# EAGLE board e-Tapperhandpiece22 (EAGLE 8.4.1)
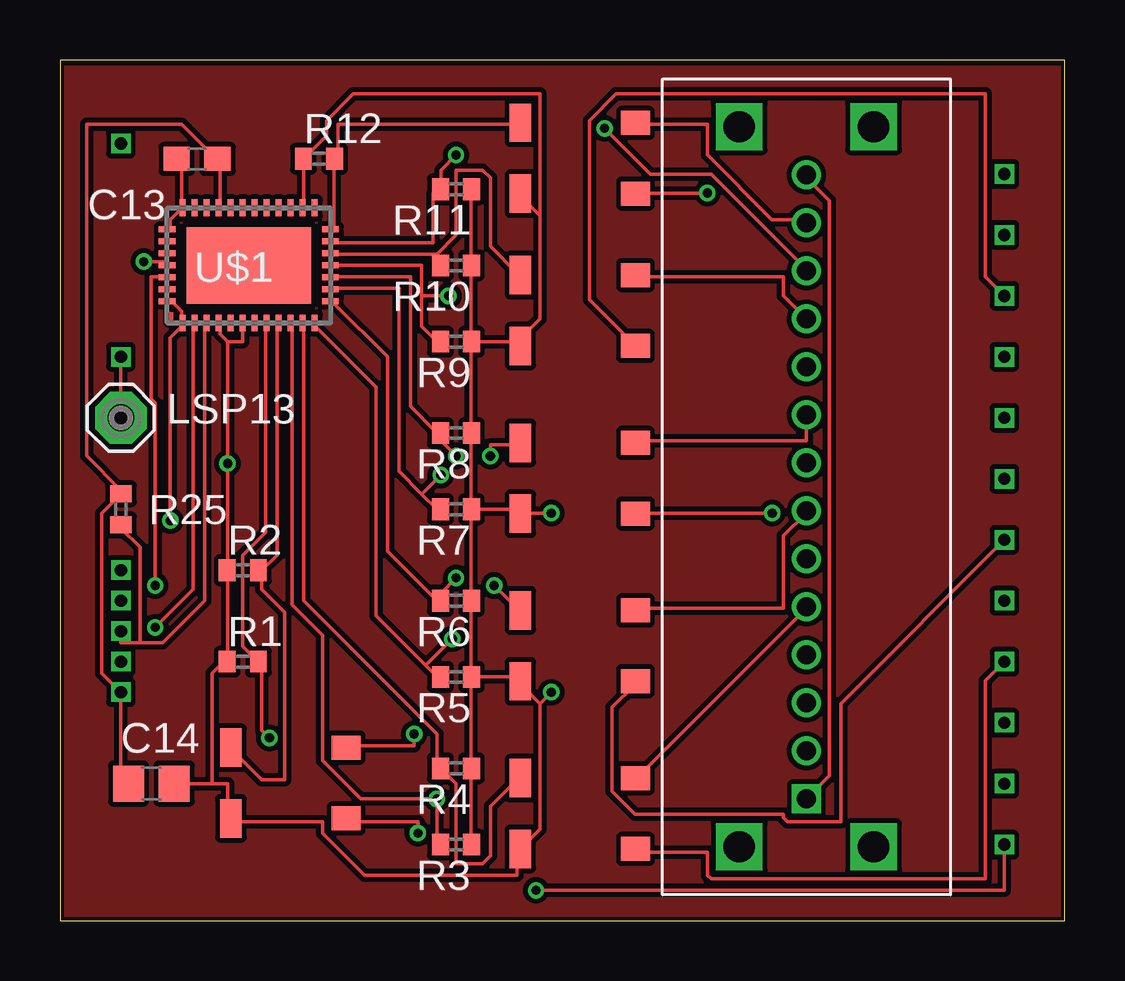
[diagram p0: board, top side]
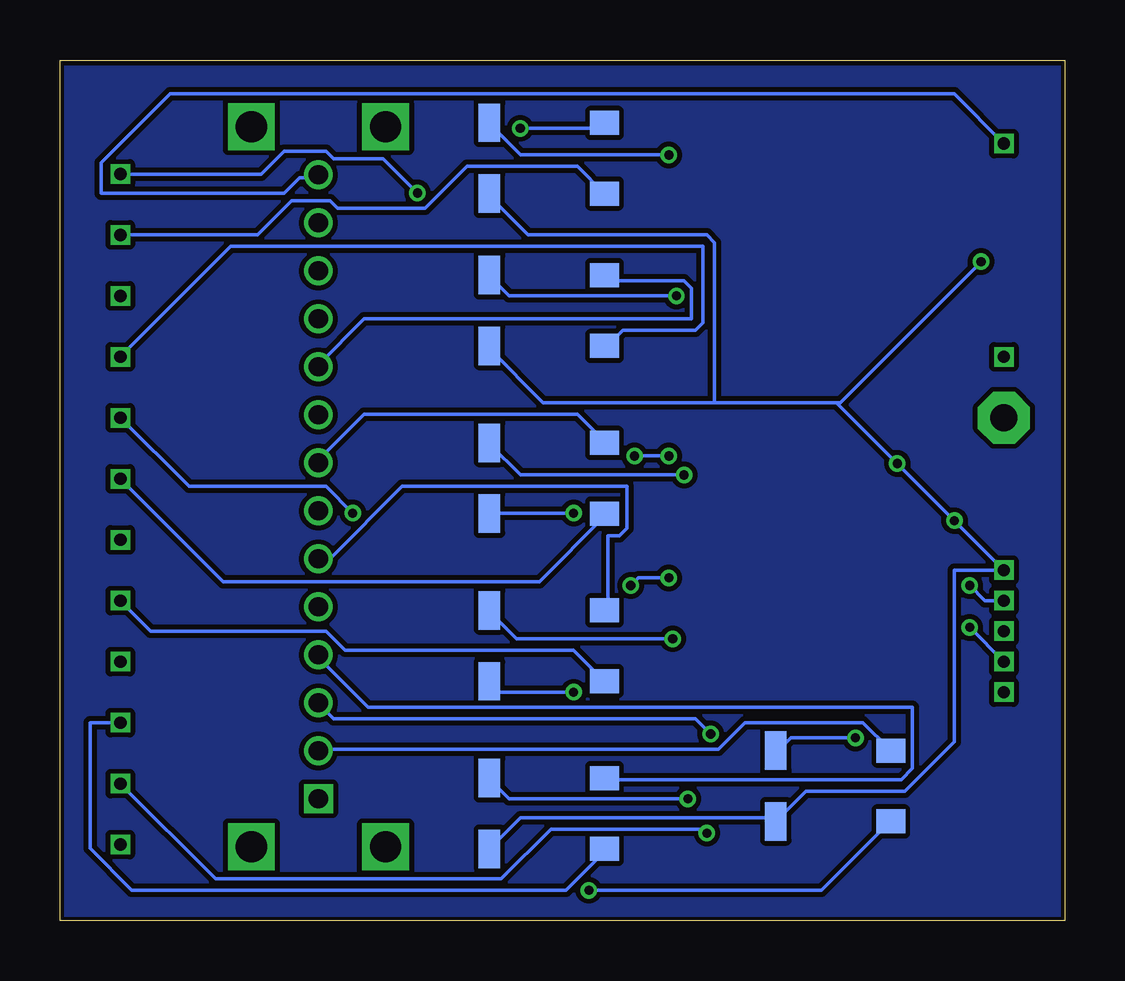
[diagram p1: board, bottom side, seen from below]

Size 41.89 x 35.87 mm. Coordinates in mm from the lower left corner, seen from the top.
Outline: 0,0 41.89,0 41.89,35.87 0,35.87 0,0
Copper layers (1*16): Top 0.035mm / dielectric 1.5mm / Bottom 0.035mm
Design rules "e-tapperhandpiece14 *": minimum track width 6mil, minimum drill 15mil, track to track 6mil, track to pad 6mil, pad to pad 6mil, via to via 6mil, smd to smd 6mil, copper to edge 6mil, drill to drill 6mil, minimum pad ring 6mil, minimum via ring 6mil, stop-mask expansion 4mil, vias tented up to drill 0mil, thermal gap 10mil
Net classes: 0 default: clearance 0.205 mm

## Footprints (pad centres in the part's own frame; a part is rotated, then mirrored left to right if it is on the bottom)
C0603 = smd 1.1 x 1: 1 -0.85,0; 2 0.85,0
C0805 = smd 1.3 x 1.5: 1 -0.95,0; 2 0.95,0
SE11 = drill 1.118 pad 2.159 octagon: MP 0,0
R0402 = smd 0.7 x 0.9: 1 -0.65,0; 2 0.65,0
ET1 = drill 0.508 square: P$1 0,0
QFN38-5X7 = smd 0.7 x 0.25: 1 -2.4,2.75; 2 -2.4,2.25; 3 -2.4,1.75; 4 -2.4,1.25; 5 -2.4,0.75; 6 -2.4,0.25; 7 -2.4,-0.25; 8 -2.4,-0.75; 9 -2.4,-1.25; 10 -2.4,-1.75; 11 -2.4,-2.25; 12 -2.4,-2.75; 20 2.4,-2.75; 21 2.4,-2.25; 22 2.4,-1.75; 23 2.4,-1.25; 24 2.4,-0.75; 25 2.4,-0.25; 26 2.4,0.25; 27 2.4,0.75; 28 2.4,1.25; 29 2.4,1.75; 30 2.4,2.25; 31 2.4,2.75 | smd 0.25 x 0.7: 13 -1.5,-3.4; 14 -1,-3.4; 15 -0.5,-3.4; 16 0,-3.4; 17 0.5,-3.4; 18 1,-3.4; 19 1.5,-3.4; 32 1.5,3.4; 33 1,3.4; 34 0.5,3.4; 35 0,3.4; 36 -0.5,3.4; 37 -1,3.4; 38 -1.5,3.4 | smd 3.2 x 5.2: EXP 0,0
SS112D01 = drill 0.8 square: P$1 6.35,3.81 | drill 0.8: P$2 6.35,5.81; P$3 6.35,7.81; P$4 6.35,9.81; P$5 6.35,11.81; P$6 6.35,13.81; P$7 6.35,15.81; P$8 6.35,17.81; P$9 6.35,19.81; P$10 6.35,21.81; P$11 6.35,23.81; P$12 6.35,25.81; P$13 6.35,27.81; P$14 6.35,29.81 | drill 1.3 square: P$15 9.15,31.81; P$16 3.55,31.81; P$17 9.15,1.81; P$18 3.55,1.81
CT02-250 = smd 1 x 1.2: P$1 -1.45,-2.4; P$2 1.5,-2.4 | smd 1.6 x 0.9: P$3 1.5,2.4; P$4 -1.45,2.4

## Placement (x,y rotation side)
C13  0.1 uF  [C0603]  5.71,31.75 180 top
C14  10 uF  [C0805]  3.81,5.71 0 top
LSP13  SE11  [SE11]  2.54,20.95 0 top
R1  [R0402]  7.62,10.79 0 top
R2  [R0402]  7.62,14.61 0 top
R3  [R0402]  16.51,3.17 180 top
R4  [R0402]  16.51,6.35 180 top
R5  [R0402]  16.51,10.16 180 top
R6  [R0402]  16.51,13.34 180 top
R7  [R0402]  16.51,17.14 180 top
R8  [R0402]  16.51,20.32 180 top
R9  [R0402]  16.51,24.13 180 top
R10  [R0402]  16.51,27.3 180 top
R11  [R0402]  16.51,30.48 180 top
R12  [R0402]  10.79,31.75 0 top
R25  10 K  [R0402]  2.54,17.14 90 top
TSP1  ET1  [ET1]  39.37,3.17 0 top
TSP2  ET1  [ET1]  39.37,5.71 0 top
TSP3  ET1  [ET1]  39.37,8.26 0 top
TSP4  ET1  [ET1]  39.37,10.79 0 top
TSP5  ET1  [ET1]  39.37,13.34 0 top
TSP6  ET1  [ET1]  39.37,15.88 0 top
TSP7  ET1  [ET1]  39.37,18.41 0 top
TSP8  ET1  [ET1]  39.37,20.95 0 top
TSP9  ET1  [ET1]  39.37,23.5 0 top
TSP10  ET1  [ET1]  39.37,26.04 0 top
TSP11  ET1  [ET1]  39.37,28.57 0 top
TSP12  ET1  [ET1]  39.37,31.11 0 top
TSP13  ET1  [ET1]  2.54,23.5 0 top
TSP14  ET1  [ET1]  2.54,32.38 0 top
TSP15  ET1  [ET1]  2.54,9.53 0 top
TSP16  ET1  [ET1]  2.54,10.79 0 top
TSP17  ET1  [ET1]  2.54,12.06 0 top
TSP18  ET1  [ET1]  2.54,13.34 90 top
TSP19  ET1  [ET1]  2.54,14.61 90 top
U$1  LTC2497  [QFN38-5X7]  7.87,27.3 90 top
U$2  SS112D01  [SS112D01]  24.77,1.27 0 top
U$3  CT02-250  [CT02-250]  9.65,5.59 90 bottom
U$4  CT02-250  [CT02-250]  9.53,5.71 90 top
U$5  CT02-250  [CT02-250]  21.59,4.45 90 bottom
U$6  CT02-250  [CT02-250]  21.59,4.45 90 top
U$7  CT02-250  [CT02-250]  21.59,11.43 90 bottom
U$8  CT02-250  [CT02-250]  21.59,11.43 90 top
U$9  CT02-250  [CT02-250]  21.59,18.41 90 bottom
U$10  CT02-250  [CT02-250]  21.59,18.41 90 top
U$11  CT02-250  [CT02-250]  21.59,25.4 90 bottom
U$12  CT02-250  [CT02-250]  21.59,25.4 90 top
U$13  CT02-250  [CT02-250]  21.59,31.75 90 bottom
U$14  CT02-250  [CT02-250]  21.59,31.75 90 top

## Library data of the parts
C13 C14 = rcl
LSP13 = solpad
R1-R12 R25 = resistor
TSP1-TSP19 = ET1
U$1 = LTC2497
U$2 = SS112D01
U$3-U$14 = CT02-250

## Nets
N$1: R9.2 U$1.16 U$11.P$3
N$2: U$1.26 U$1.27
N$3: U$1.24 U$1.25
N$4: TSP1.P$1 U$3.P$1
N$5: R12.2 U$1.19 U$14.P$3
N$6: TSP2.P$1 U$4.P$1
N$7: R4.2 U$1.11 U$6.P$3
N$8: R10.2 U$1.17 U$12.P$3
N$9: R8.2 U$1.15 U$10.P$3
N$10: TSP3.P$1 U$5.P$1
N$11: TSP4.P$1 U$6.P$1
N$12: TSP5.P$1 U$7.P$1
N$13: TSP6.P$1 U$8.P$1
N$14: TSP7.P$1 U$9.P$1
N$15: TSP8.P$1 U$10.P$1
N$16: TSP9.P$1 U$11.P$1
N$17: TSP10.P$1 U$12.P$1
N$18: R5.2 U$1.12 U$7.P$3
N$19: R6.2 U$1.13 U$8.P$3
N$20: R7.2 U$1.14 U$9.P$3
N$21: TSP11.P$1 U$13.P$1
N$22: R3.2 U$1.10 U$5.P$3
N$23: R2.2 U$1.9 U$4.P$3
N$24: R11.2 U$1.18 U$13.P$3
N$25: R1.2 U$1.8 U$3.P$3
N$26: TSP12.P$1 U$14.P$1
TP1: U$2.P$2 U$3.P$2
TP2: U$2.P$3 U$4.P$2
TP3: U$2.P$4 U$5.P$2
TP4: U$2.P$5 U$6.P$2
TP5: U$2.P$6 U$7.P$2
TP6: U$2.P$7 U$8.P$2
TP7: U$2.P$8 U$9.P$2
TP8: U$2.P$9 U$10.P$2
TP9: U$2.P$10 U$11.P$2
TP10: U$2.P$11 U$12.P$2
TP11: U$2.P$12 U$13.P$2
TP12: U$2.P$13 U$14.P$2
TS+: LSP13.MP TSP13.P$1
TS-: TSP14.P$1 U$2.P$1 U$2.P$14
TSCA: TSP18.P$1 U$1.36
TSCL: TSP16.P$1 U$1.2
TSDA: R25.1 TSP17.P$1 U$1.3
TSGND: C13.2 C14.2 R1.1 R2.1 R3.1 R4.1 R5.1 R6.1 R7.1 R8.1 R9.1 R10.1 R11.1 R12.1 TSP19.P$1 U$1.1 U$1.4 U$1.6 U$1.7 U$1.20 U$1.21 U$1.22 U$1.23 U$1.30 U$1.31 U$1.32 U$1.33 U$1.34 U$1.35 U$1.37 U$1.38 U$3.P$4 U$4.P$4 U$5.P$4 U$6.P$4 U$7.P$4 U$8.P$4 U$9.P$4 U$10.P$4 U$11.P$4 U$12.P$4 U$13.P$4 U$14.P$4
VCC: C13.1 C14.1 R25.2 TSP15.P$1 U$1.28 U$1.29

## Tracks (layer width: path | path; a pad name or v marks a point on that pad's centre or on a via)
GND
  pour Top: 0,0 0,35.56 41.91,35.56 41.91,0
  pour Bottom: 0,0 0,35.56 41.91,35.56 41.91,0
N$1  (via drill 0.38)
  Top 0.152: U$1.16 15.08,27.3 15.08,26.04 | 15.08,26.04 15.08,24.77 15.72,24.13 R9.2 | 15.08,26.04 v16.19,26.04
  Bottom 0.152: v16.19,26.04 23.18,26.04 23.97,26.83 U$11.P$3
N$2
  Top 0.152: U$1.27 7.14,29.69 7.62,29.69 U$1.26
N$3
  Top 0.152: U$1.25 8.1,29.69 8.57,29.69 U$1.24
N$4  (via drill 0.38)
  Top 0.152: v19.84,1.27 39.37,1.27 TSP1.P$1
  Bottom 0.152: v19.84,1.27 10.16,1.27 7.3,4.13 U$3.P$1
N$5
  Top 0.152: U$1.19 11.43,28.89 11.43,31.75 R12.2 11.59,31.75 11.59,33.18 19.05,33.18 U$14.P$3
N$6  (via drill 0.38)
  Top 0.152: v14.92,3.65 14.92,4.13 12.06,4.13 U$4.P$1
  Bottom 0.152: v14.92,3.65 15.08,3.81 21.43,3.81 23.5,1.75 35.4,1.75 TSP2.P$1
N$7
  Top 0.152: U$1.11 10.16,24.77 10.16,13.34 15.72,7.78 15.72,6.35 R4.2 15.88,6.35 16.51,5.71 16.51,2.38 17.62,2.38 17.94,2.7 17.94,4.76 19.05,5.87 U$6.P$3
N$8
  Top 0.152: 15.72,27.78 11.43,27.78 U$1.17 | 15.72,27.78 15.72,27.3 R10.2 | 15.72,27.78 16.51,28.57 16.51,31.27 17.62,31.27 17.94,30.96 17.94,28.1 19.05,26.99 U$12.P$3
N$9  (via drill 0.38)
  Top 0.152: U$1.15 11.43,26.83 14.61,26.83 14.61,21.43 15.72,20.32 R8.2 15.88,20.32 15.88,20 v16.51,19.37 | v17.94,19.37 17.94,19.84 19.05,19.84 U$10.P$3
  Bottom 0.152: v16.51,19.37 v17.94,19.37
N$10
  Bottom 0.152: TSP3.P$1 40.64,8.26 40.64,3.02 38.89,1.27 20.8,1.27 19.21,2.86 U$5.P$1
N$11
  Top 0.152: TSP4.P$1 38.58,10 38.58,1.75 27.15,1.75 26.99,1.91 26.99,2.86 24.13,2.86 U$6.P$1
N$12
  Bottom 0.152: TSP5.P$1 38.1,12.06 30.8,12.06 30,11.27 20.48,11.27 19.21,10 U$7.P$1
N$13
  Top 0.152: TSP6.P$1 32.54,9.05 32.54,4.13 30.32,4.13 30.16,4.29 30.16,4.45 23.97,4.45 23.02,5.4 23.02,8.89 23.97,9.84 U$8.P$1
N$14
  Bottom 0.152: TSP7.P$1 35.08,14.13 21.91,14.13 19.21,16.83 U$9.P$1
N$15  (via drill 0.38)
  Top 0.152: v29.69,16.99 24.13,16.99 U$10.P$1
  Bottom 0.152: v29.69,16.99 30.8,18.1 36.51,18.1 TSP8.P$1
N$16
  Bottom 0.152: TSP9.P$1 34.77,28.1 15.08,28.1 15.08,24.92 15.4,24.61 18.41,24.61 19.05,23.97 U$11.P$1
N$17
  Top 0.152: TSP10.P$1 38.58,26.83 38.58,34.45 23.18,34.45 22.07,33.34 22.07,25.88 23.97,23.97 U$12.P$1
N$18  (via drill 0.38)
  Top 0.152: 15.24,10.64 15.72,10.16 R5.2 | 15.24,10.64 13.18,12.7 13.18,22.23 10.64,24.77 U$1.12 | 15.24,10.64 v16.35,11.75
  Bottom 0.152: v16.35,11.75 22.86,11.75 23.97,12.86 U$7.P$3
N$19  (via drill 0.38)
  Top 0.152: U$1.13 11.43,25.72 13.65,23.5 13.65,15.4 15.72,13.34 R6.2 15.88,13.34 15.88,13.65 v16.51,14.29 | v18.1,13.97 19.05,13.02 U$8.P$3
  Bottom 0.152: v18.1,13.97 17.78,14.29 v16.51,14.29
N$20  (via drill 0.38)
  Top 0.152: 15.08,17.78 15.72,17.14 R7.2 | 15.08,17.78 14.13,18.73 14.13,26.35 11.43,26.35 U$1.14 | 15.08,17.78 v15.88,18.57
  Bottom 0.152: v15.88,18.57 22.7,18.57 23.97,19.84 U$9.P$3
N$21
  Bottom 0.152: TSP11.P$1 33.66,28.57 32.23,30 30.64,30 30.32,29.69 26.67,29.69 24.92,31.43 20.32,31.43 19.21,30.32 U$13.P$1
N$22  (via drill 0.38)
  Top 0.152: U$1.10 9.68,24.77 9.68,13.18 10.95,11.91 10.95,6.67 12.54,5.08 v15.72,5.08 15.72,3.17 R3.2
  Bottom 0.152: v15.72,5.08 23.18,5.08 23.97,5.87 U$5.P$3
N$23
  Top 0.152: 8.41,14.61 9.05,15.24 9.05,24.77 U$1.9 | 8.41,14.61 8.41,13.81 9.37,12.86 9.37,5.87 8.41,5.87 7.14,7.14 U$4.P$3 | 8.41,14.61 R2.2
N$24  (via drill 0.38)
  Top 0.152: U$1.18 11.43,28.26 15.56,28.26 15.56,30.32 15.72,30.48 R11.2 15.88,30.48 15.88,31.27 v16.51,31.91
  Bottom 0.152: v16.51,31.91 22.7,31.91 23.97,33.18 U$13.P$3
N$25  (via drill 0.38)
  Top 0.152: U$1.8 8.57,24.77 8.57,16.19 7.62,15.24 7.62,11.43 8.26,10.79 R1.2 8.41,10.79 8.41,7.94 v8.73,7.62
  Bottom 0.152: v8.73,7.62 11.43,7.62 11.91,7.14 U$3.P$3
N$26  (via drill 0.38)
  Top 0.152: v26.99,30.32 24.13,30.32 U$14.P$1
  Bottom 0.152: v26.99,30.32 28.42,31.75 30.48,31.75 30.8,32.07 32.54,32.07 33.5,31.11 TSP12.P$1
TP1
  Bottom 0.152: U$3.P$2 7.3,7.14 8.41,8.26 13.34,8.26 14.45,7.14 31.11,7.14 U$2.P$2
TP2  (via drill 0.38)
  Top 0.152: v14.76,7.78 14.76,7.3 12.06,7.3 U$4.P$2
  Bottom 0.152: v14.76,7.78 15.4,8.41 30.48,8.41 31.11,9.05 U$2.P$3
TP3
  Bottom 0.152: U$5.P$2 19.05,5.87 6.83,5.87 6.35,6.35 6.35,8.89 29.05,8.89 31.11,10.95 U$2.P$4
TP4
  Top 0.152: U$6.P$2 24.13,6.03 31.11,13.02 U$2.P$5
TP5
  Bottom 0.152: U$7.P$2 19.05,13.02 19.05,16.03 18.57,16.03 18.26,16.35 18.26,18.1 27.62,18.1 30.64,15.08 U$2.P$6
TP6
  Top 0.152: U$8.P$2 24.13,13.02 30.16,13.02 30.16,16.03 31.11,16.99 U$2.P$7
TP7
  Bottom 0.152: U$9.P$2 19.21,20 20.32,21.11 29.21,21.11 31.11,19.21 U$2.P$8
TP8
  Top 0.152: U$2.P$9 31.11,20 24.13,20 U$10.P$2
TP9
  Bottom 0.152: U$11.P$2 19.05,26.83 18.89,26.67 15.88,26.67 15.56,26.35 15.56,25.08 29.21,25.08 31.11,23.18 U$2.P$10
TP10
  Top 0.152: U$12.P$2 24.13,26.83 30.16,26.83 30.16,26.04 U$2.P$11
TP11  (via drill 0.38)
  Top 0.152: v22.7,33.02 24.61,31.11 27.15,31.11 31.11,27.15 U$2.P$12
  Bottom 0.152: v22.7,33.02 19.37,33.02 19.21,33.18 U$13.P$2
TP12
  Top 0.152: U$14.P$2 24.13,33.18 26.99,33.18 26.99,31.91 29.69,29.21 31.11,29.21 U$2.P$13
TS+
  Top 0.152: LSP13.MP TSP13.P$1
TS-
  Top 0.152: U$2.P$1 32.07,6.03 32.07,30 31.11,30.96 U$2.P$14
  Bottom 0.152: TSP14.P$1 4.6,34.45 37.31,34.45 40.16,31.59 40.16,30.32 32.54,30.32 31.91,30.96 31.11,30.96 U$2.P$14
TSCA  (via drill 0.38)
  Top 0.152: v3.97,13.97 3.97,21.59 3.81,21.75 3.81,26.83 4.45,26.83 U$1.36
  Bottom 0.152: v3.97,13.97 3.33,13.34 TSP18.P$1
TSCL  (via drill 0.38)
  Top 0.152: v3.97,12.22 5.56,13.81 5.56,24.77 U$1.2
  Bottom 0.152: TSP16.P$1 v3.97,12.22
TSDA
  Top 0.152: 3.33,11.59 2.54,11.59 TSP17.P$1 | 3.33,11.59 4.29,11.59 6.03,13.34 6.03,24.77 U$1.3 | 3.33,11.59 3.33,15.56 2.54,16.35 R25.1
TSGND  (via drill 0.38)
  Top 0.152: 6.35,5.71 6.99,5.71 6.99,4.29 U$4.P$4 7.14,4.13 10.95,4.13 10.95,3.65 12.7,1.91 19.05,1.91 19.05,2.86 U$6.P$4 19.21,3.02 20,3.81 20,9.05 | 6.35,5.71 C14.2 | 6.99,24.13 6.67,24.45 6.67,24.77 U$1.4 | 6.99,24.13 7.62,24.13 7.62,24.77 U$1.6 7.62,24.92 8.1,24.92 U$1.7 | 6.99,14.61 6.99,10.79 R1.1 6.83,10.79 6.35,10.32 6.35,5.71 | 6.99,14.61 v6.99,19.05 6.99,24.13 | 6.99,14.61 R2.1 | 17.14,6.35 17.14,3.17 R3.1 | 17.14,10.16 17.14,13.34 | 20,9.05 19.21,9.84 U$8.P$4 19.05,10 19.05,10.16 R5.1 17.14,10.16 | 20,9.05 v20.48,9.53 | 17.14,10.16 17.14,6.35 | 17.14,6.35 R4.1 | 17.14,17.14 17.14,20.32 | v20.48,16.99 19.21,16.99 U$10.P$4 19.05,16.99 19.05,17.14 R7.1 17.14,17.14 | 17.14,27.3 17.14,30.48 R11.1 | U$1.23 9.21,29.69 9.53,29.69 U$1.22 9.68,29.69 10,29.69 U$1.21 | U$1.20 10.64,29.69 10.16,29.69 U$1.21 | 10.16,31.75 10.16,29.84 U$1.21 | 19.05,24.13 R9.1 17.14,24.13 | 19.05,24.13 19.05,23.97 U$12.P$4 19.05,24.13 | 20,29.37 19.21,30.16 U$14.P$4 | 20,29.37 20,25.08 19.05,24.13 | 10.16,31.75 11.11,32.7 11.11,33.34 12.22,34.45 20,34.45 20,29.37 | 10.16,31.75 R12.1 | 17.14,24.13 17.14,27.3 | 17.14,27.3 R10.1 | 17.14,24.13 17.14,20.32 | 17.14,20.32 R8.1 | 17.14,17.14 17.14,13.34 | 17.14,13.34 R6.1 | U$1.31 5.24,29.69 5.56,29.69 U$1.30 | 4.45,27.78 4.45,27.46 | 4.45,27.46 4.45,27.3 U$1.35 | 4.45,27.78 4.45,28.26 U$1.33 4.45,28.42 4.45,28.73 U$1.32 4.6,28.89 4.6,29.21 5.08,29.69 U$1.31 | 4.45,27.78 U$1.34 | C13.2 4.92,31.75 5.08,31.59 5.08,29.84 U$1.31 | U$1.37 4.45,26.19 4.45,25.88 U$1.38 4.6,25.88 5.08,25.4 5.08,24.92 U$1.1 5.08,24.77 4.6,24.29 v4.6,16.67 | v3.49,27.46 4.45,27.46
  Bottom 0.152: v20.48,9.53 23.65,9.53 23.97,9.84 U$7.P$4 | v20.48,16.99 23.97,16.99 U$9.P$4 | U$5.P$4 23.97,3.02 22.7,4.29 12.06,4.29 U$3.P$4 11.91,4.29 10.79,5.4 6.67,5.4 4.6,7.46 4.6,14.61 TSP19.P$1 v4.6,16.67 v6.99,19.05 9.53,21.59 | 9.53,21.59 14.61,21.59 | 14.61,21.59 21.75,21.59 23.97,23.81 U$11.P$4 | 14.61,21.59 14.61,28.26 14.92,28.57 22.38,28.57 23.97,30.16 U$13.P$4 | v3.49,27.46 9.37,21.59 9.53,21.59
VCC
  Top 0.152: U$1.29 6.19,29.69 6.51,29.69 U$1.28 6.67,29.84 6.67,31.75 C13.1 6.51,31.75 5.08,33.18 1.11,33.18 1.11,19.37 2.54,17.94 R25.2 1.75,16.99 1.75,10.32 TSP15.P$1 2.54,6.03 C14.1